# Altium PCB Digital_Watch.PcbDoc (part 2 of 2)
Units mm, origin at the board's own origin, x right, y up, seen from the top; angles counter-clockwise.
Board outline 70.45 x 70.45 mm, 4 copper layers (Top Layer, Mid Layer 1, Mid Layer 2, Bottom Layer), stack 1.583 mm thick; 72 components, 93 nets, 389 pads, 114 vias.
Unrouted connection lines stored in the file: 91.
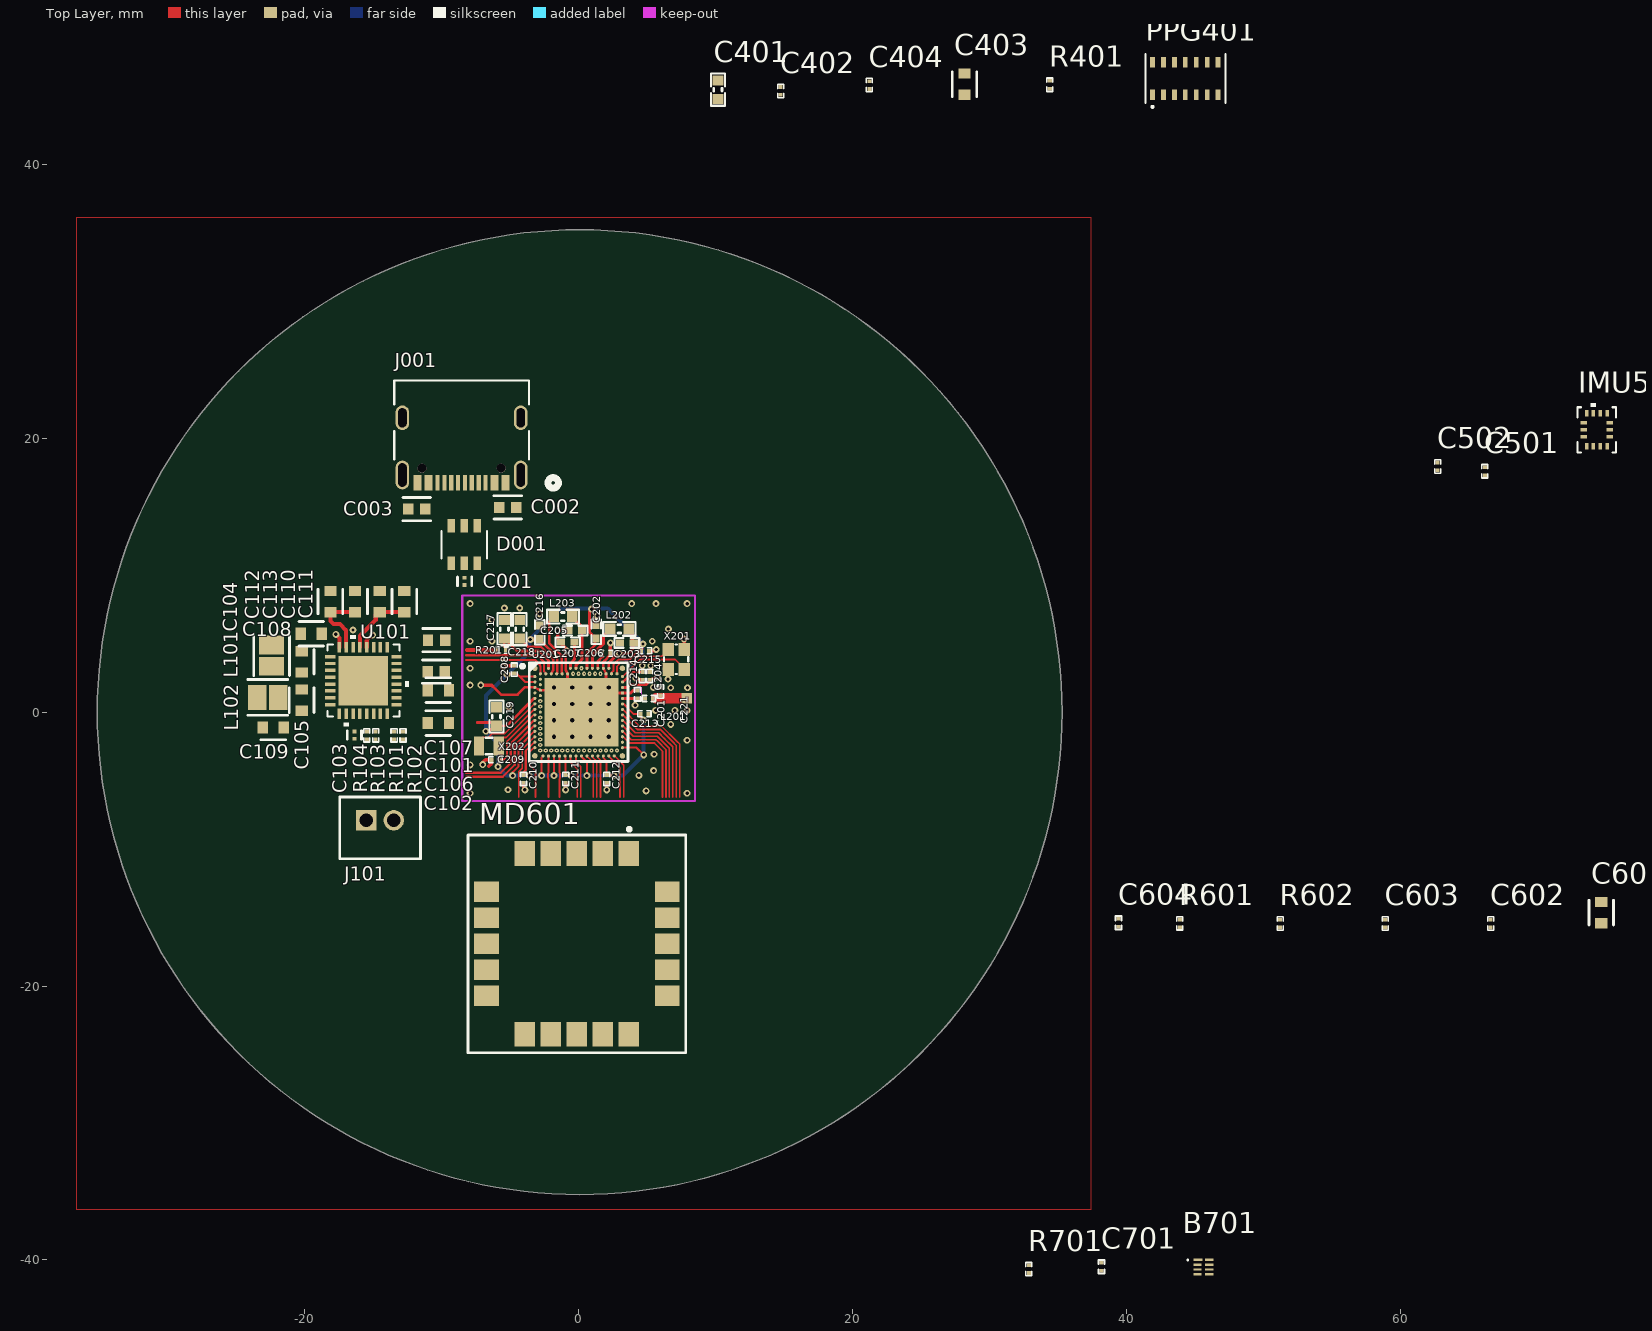
[diagram p0: Top Layer view]

## Via types
v1: diameter 0.5, hole 0.25, Top Layer to Bottom Layer, tented both sides, 65 vias
v2: diameter 0.3, hole 0.1, Top Layer to Mid Layer 1, tented top, 30 vias
v3: diameter 0.61, hole 0.305, Top Layer to Bottom Layer, 16 vias
v4: diameter 0.5, hole 0.25, Top Layer to Bottom Layer, 3 vias

## Nets (pads, with @x,y where several pads share a name; then routed paths per layer and width w, separated by ;. In a path a pad name is that pad's centre, name@x,y a point inside that pad or via, vN(x,y) a via of type N, cw(c..) or ccw(c..) an arc to the next point about the centre after c; other vN are vias at no path point) (continued)
VSYS: C104.1 C105.1 C106.1 C403.1 C404.2 PPG401.9 PPG401.10 U101.4 U101.20 U101.28 | length 1.1
  Top Layer w0.3: U101.28 -15.475,5.25 -15.1,5.625 v4(-15.05,5.625)
XC1: U201.C31 X201.1 | length 5.3
  Top Layer w0.125: U201.C31 3.224,2.6 4.462,3.838 7.059,3.838 7.7,3.197 X201.1
XC2: U201.B30 X201.3 | length 4.8
  Top Layer w0.125: U201.B30 2.8,3.348 3.039,3.588 3.858,3.588 4.358,4.088 6.058,4.088 X201.3
pads on no net: IMU501.2 IMU501.3 IMU501.4 IMU501.10 IMU501.11 J001.13 J001.14 J001.15 J001.16 J001.17 J001.18 J001.A8 J001.B8 MD601.8 MD601.13 MD601.14 PPG401.1 PPG401.5 PPG401.6 PPG401.7 PPG401.8 PPG401.14 U101.25 U101.26 U101.27 U101.30 U201. U201.A1 U201.A31 U201.AG31 U201.AL1 U201.AL31 U201.D2 U201.F2 U201.J1 U201.K2 U201.T2
copper on no net:
  other v4: -16.475,5.999

## Polygon pours and split planes (outlines as drawn)
GND on Top Layer "Top_Layer-GND" (solid, remove dead copper, shelved, pour order 1000): -36.7,36.1 -36.7,-36.3 37.45,-36.3 37.45,36.1
GND on Bottom Layer "Bottom_Layer-GND" (solid, remove dead copper, pour order 1001): -36.625,36.025 -36.625,-36.325 37.425,-36.325 37.425,36.025
GND on Mid Layer 2 "Mid_Layer_2-GND" (solid, remove dead copper, pour order 1002): -36.675,36.075 -36.675,-36.3 37.45,-36.3 37.45,36.075
GND on Mid Layer 1 "Mid_Layer_1-GND" (solid, remove dead copper, pour order 1004): -36.7,36.1 -36.7,-36.3 37.4,-36.3 37.4,36.1

## Keep-outs
Top Layer:
  rectangle: 4.575,1.35 4.6,1.775
Keep-Out Layer:
  lines w0.15: -8.5,-6.5 -8.5,8.5 8.5,8.5 8.5,-6.5 -8.5,-6.5

## Other copper
Top Layer:
  pour cut-out: 0.127,7.62 0.508,7.62 0.508,7.569 0.127,7.569
  pour cut-out: 5.867,5.74 5.867,2.007 8.179,2.007 8.179,5.74
Mid Layer 1:
  pour cut-out: 9.9,-0.083 3.982,-0.083 3.982,2.083 9.9,2.083
Mid Layer 2:
  pour cut-out: 9.9,-0.083 3.982,-0.083 3.982,2.083 9.9,2.083

## Silkscreen, mask and mechanical layers (free items; w line width, h text height)
Mechanical 1:
  circle w0.254: c0.075,0 r35.225

## Dimensions
8.5,-6.5 to -8.5,-6.5 on Mechanical 3
8.5,-6.5 to 8.5,8.5 on Mechanical 3

## Text inside footprints (layer, text, board x,y; h text height)
D001: Mechanical 13 "*" at -8.172,13.048 h1.27 r270
IMU501: Mechanical 13 "*" at 73.984,19.331 h1.27 r90
U101: Mechanical 13 "*" at -18.087,3.665 h1.27